# Altium PCB AnalogProject.PcbDoc
Units mil, origin at the board's own origin, x right, y up, seen from the top; angles counter-clockwise.
Board outline 3937.01 x 3937.01 mil, 2 copper layers (Top Layer, Bottom Layer); 74 components, 43 nets, 212 pads, 24 vias.
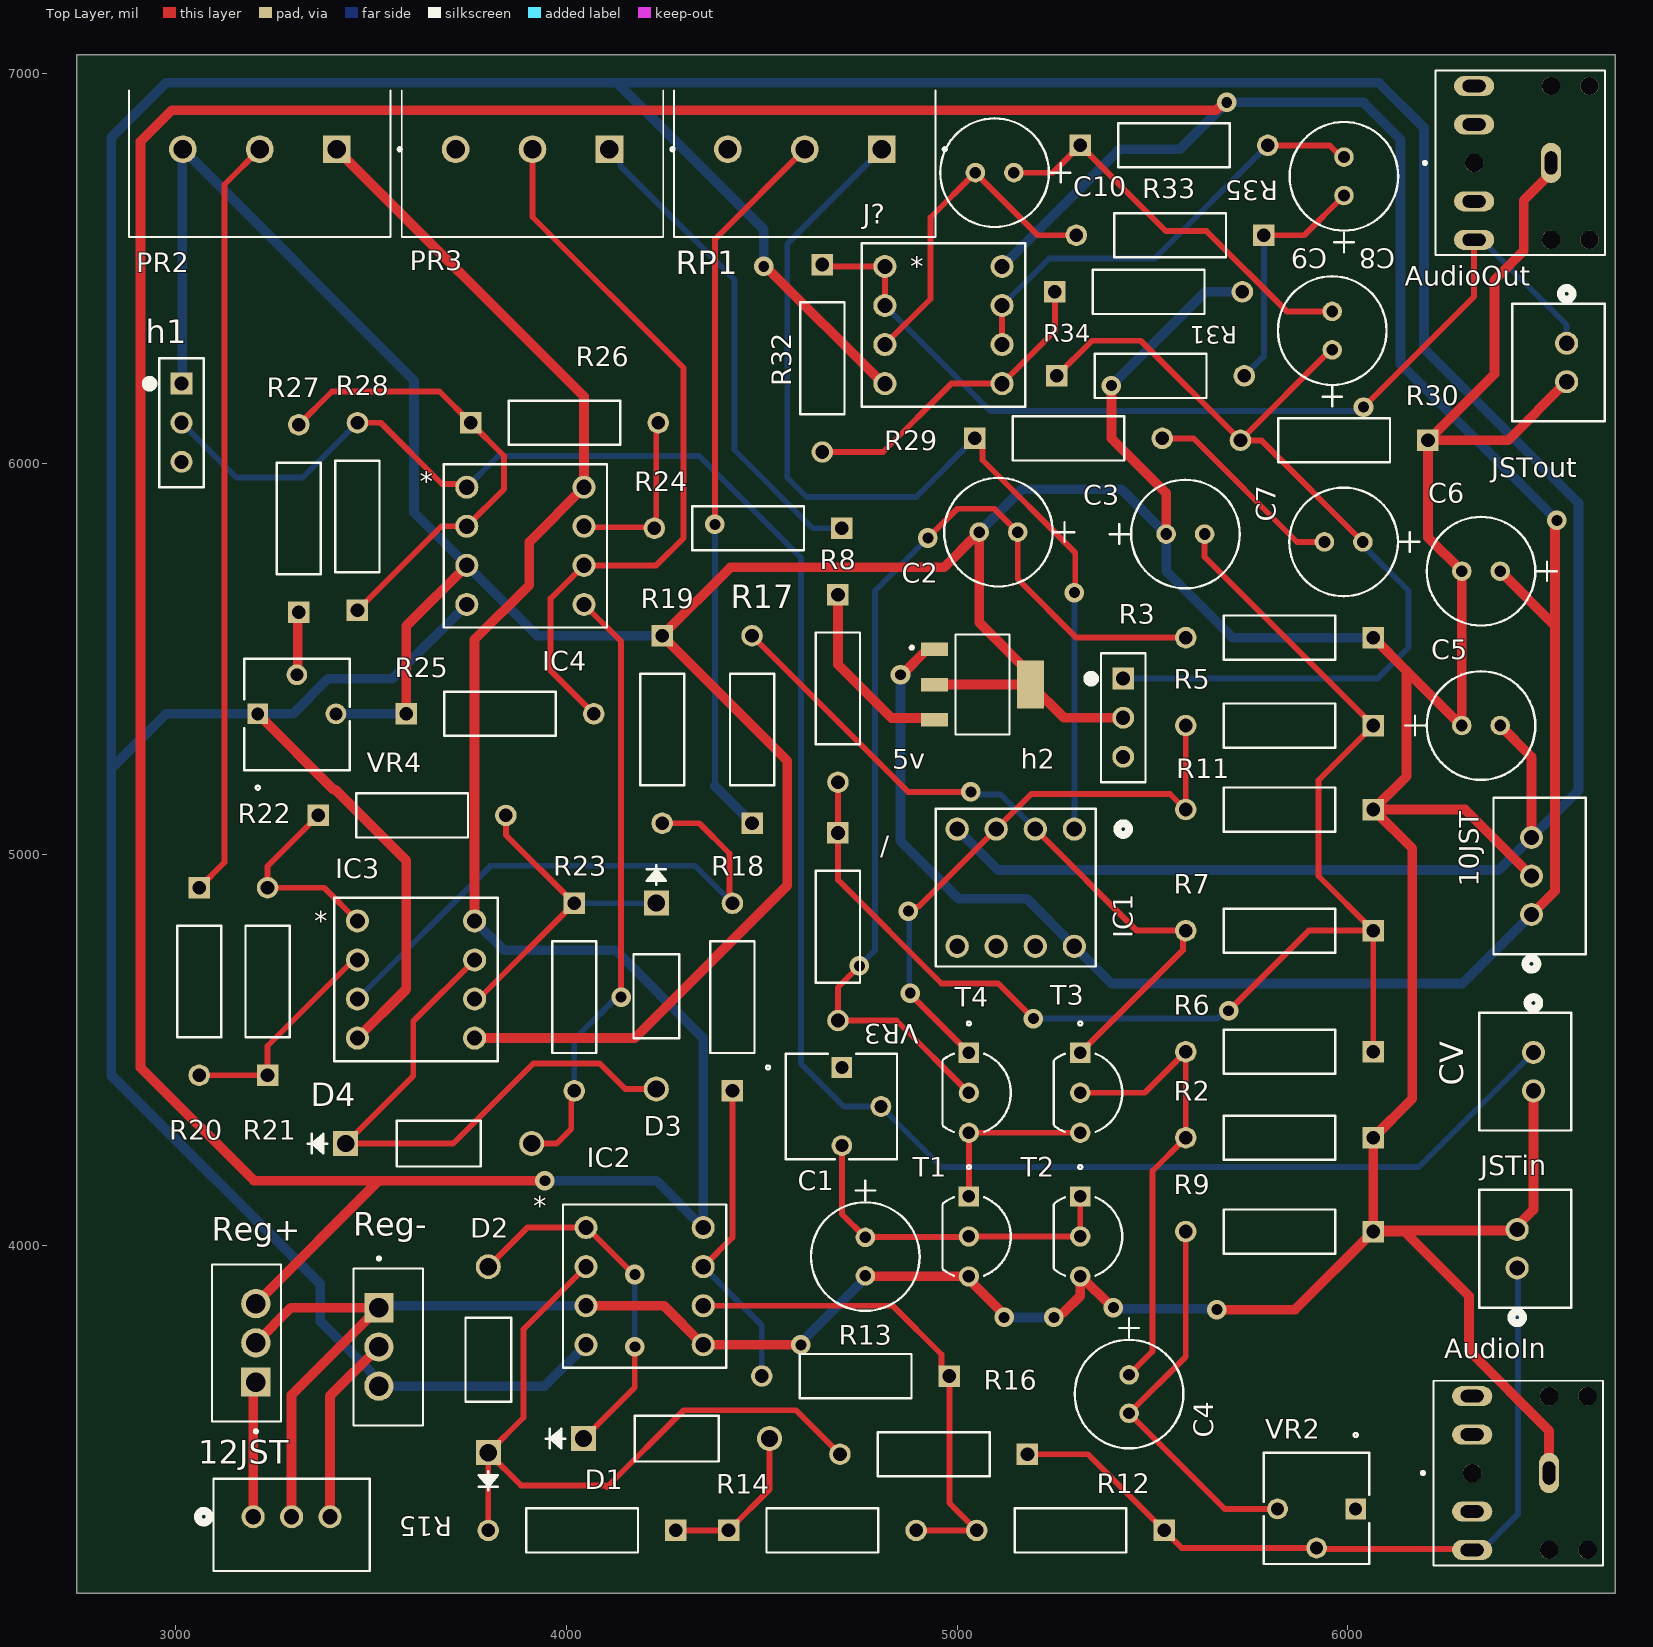
[diagram p0: Top Layer view]
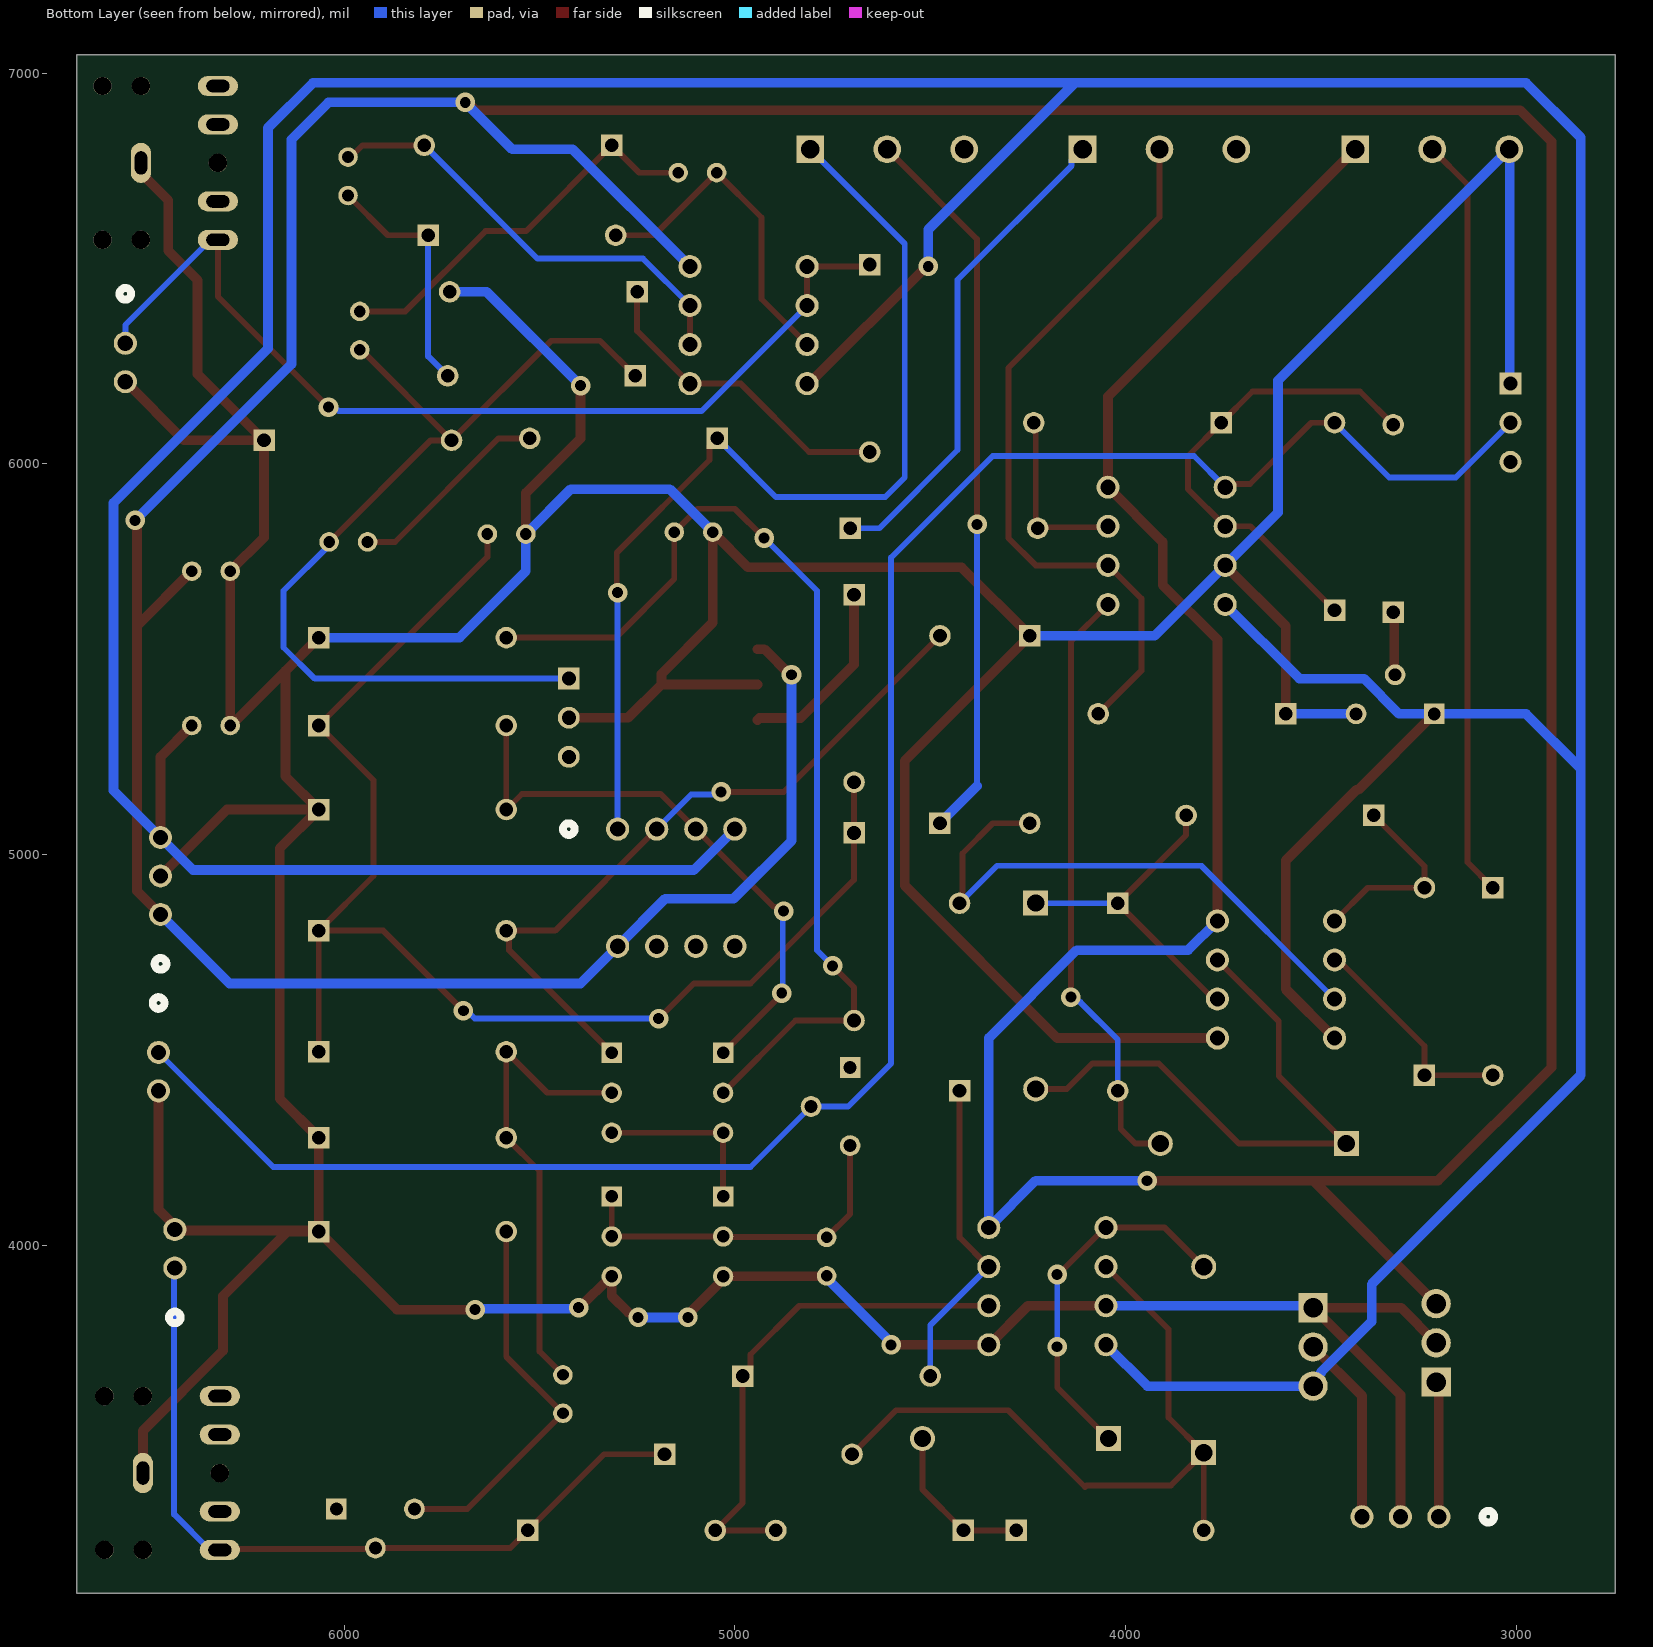
[diagram p1: Bottom Layer view, seen from below]
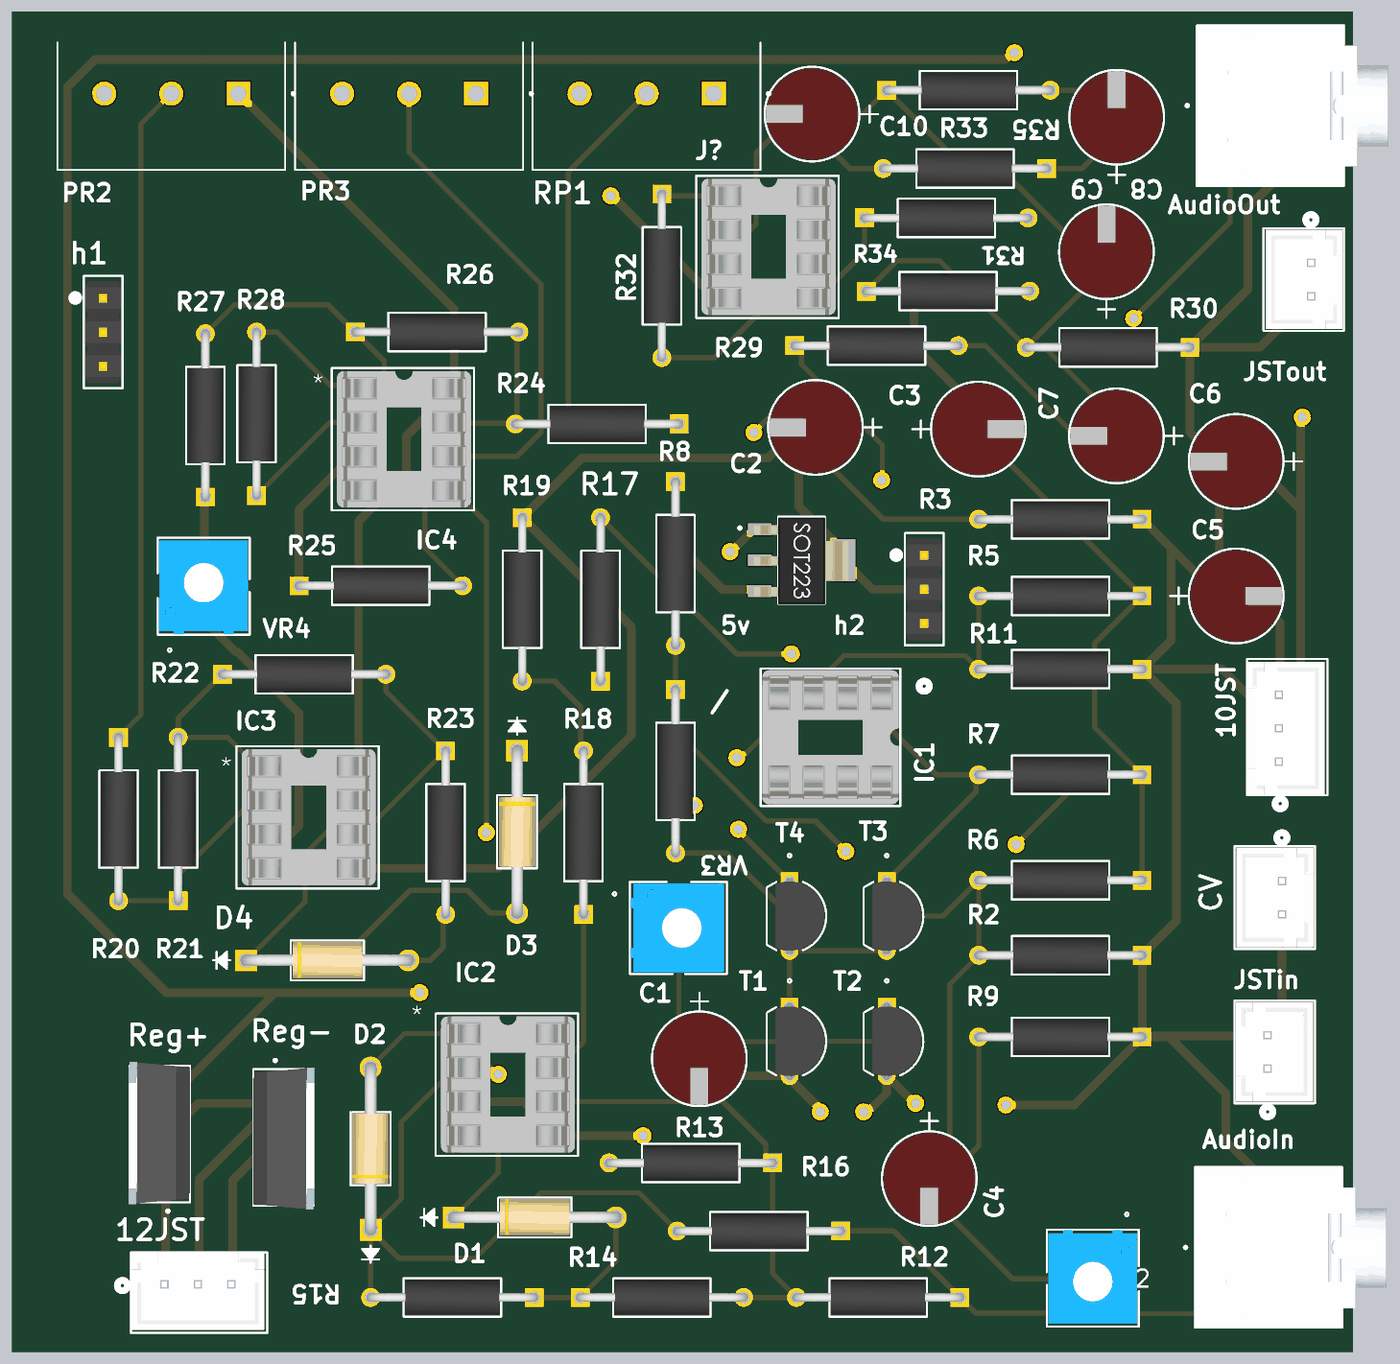
[diagram p2: 3D render of the assembled board from above, using the file's embedded part models]

## Layer stack, top to bottom
Top Solder: solder mask 0.4, Solder Resist, Dk 3.5
Top Layer: signal copper 1.4
Dielectric 1: dielectric 12.6, FR-4, Dk 4.8
Bottom Layer: signal copper 1.4
Bottom Solder: solder mask 0.4, Solder Resist, Dk 3.5

## Board outline
2747.01,3109.51 2747.01,7046.52 6684.02,7046.52 6684.02,3109.51

## Design rules (kind name [scope] priority, off if disabled: settings)
Clearance [All] p1: gap=10 ignorepadtopadclearanceinfootprint=FALSE ismatrix=TRUE
PolygonConnect [All] p1: connectstyle=Relief reliefconductorwidth=10 reliefentries=4 polygonreliefangle="90 Angle" airgapwidth=10
RoutingVias [All] p1: holewidth=28 width=50 viastyle="Through Hole" minholewidth=28 minwidth=50 maxholewidth=28 maxwidth=50
SolderMaskExpansion [All] p1: expansion=4 istentingtop=FALSE
Width MaxMinWidth_1 [All] p1: maxlimit=25 minlimit=10 preferedwidth=10 minimp=50.000000 maximp=50.000000 favimp=50.000000
Width [All] p2: maxlimit=10 minlimit=10 preferedwidth=10
30 further rules are at their usual default settings.

## Components (designator, comment, footprint, x,y, rotation, side; value= is the part's Value field where it differs from the comment)
5v "amsRegulator" SOT230P700X180-4N 5065,5435 r0 top (schematic designator U?)
10JST "3pinJST" CONN_B3B-XH-A_JST 6470,4846.57 r270 top
12JST "3pinJST" CONN_B3B-XH-A_JST 3198.15,3305 r180 top
/ "1/4W_Resistor" STA_RNF14_STP 4695,5055 r270 top (schematic designator R4)
AudioIn "Audioport" CUI_SJ1-3525N 6515,3416.85 r90 top
AudioOut "Audioport" CUI_SJ1-3525N 6520,6770 r90 top
C1 "capacitor" CAP_YX_6P3X11_RUB 4765,4020 r270 top
C2 "capacitor" CAP_YX_6P3X11_RUB 5155,5825 r180 top
C3 "capacitor" CAP_YX_6P3X11_RUB 5535,5820 r0 top
C4 "capacitor" CAP_YX_6P3X11_RUB 5440,3668.21 r270 top
C5 "capacitor" CAP_YX_6P3X11_RUB 6291.57,5330 r0 top
C6 "capacitor" CAP_YX_6P3X11_RUB 6390,5725 r180 top
C7 "capacitor" CAP_YX_6P3X11_RUB 6038.43,5800 r180 top
C8 "capacitor" CAP_YX_6P3X11_RUB 5990,6686.57 r90 top
C9 "capacitor" CAP_YX_6P3X11_RUB 5960,6291.57 r90 top
C10 "capacitor" CAP_YX_6P3X11_RUB 5145,6745 r180 top
CV "2pinJST" CONN_B2B-XH-A_JST 6475,4493.43 r90 top
D1 "UF4007" DO-41_FAS 4044,3505 r0 top
D2 "UF4007" DO-41_FAS 3800,3469 r90 top
D3 "UF4007" DO-41_FAS 4230,4875.5 r270 top
D4 "UF4007" DO-41_FAS 3435,4260 r0 top
h1 "3pinHeaders" CONN_M20-99903XX_HRW 3015,6205 r270 top
h2 "3pinHeaders" CONN_M20-99903XX_HRW 5425,5450 r270 top (schematic designator header2)
IC1 "4_PinSocket" CONN8_1-2199298-2_TEC 5300,5065 r180 top
IC2 "8pinBase" "CONN_A 08-LC-TT_ASM" 4050,4045 r0 top
IC3 "8pinBase" "CONN_A 08-LC-TT_ASM" 3465,4830 r0 top
IC4 "8pinBase" "CONN_A 08-LC-TT_ASM" 3745,5940 r0 top
J? "8pinBase" "CONN_A 08-LC-TT_ASM" 4815,6505 r0 top
JSTin "2pinJST" CONN_B2B-XH-A_JST 6433.28,3941.57 r270 top
JSTout "2pinJST" CONN_B2B-XH-A_JST 6560,6308.43 r90 top
PR2 "roraryPotentiometer" POT_PTN16-A01115K1A1 3411.85,6805 r180 top
PR3 "roraryPotentiometer" POT_PTN16-A01115K1A1 4110,6805 r180 top
R2 "1/4W_Resistor" STA_RNF14_STP 6065,4275 r180 top
R3 "1/4W_Resistor" STA_RNF14_STP 6065,5555 r180 top
R5 "1/4W_Resistor" STA_RNF14_STP 6065,5330 r180 top
R6 "1/4W_Resistor" STA_RNF14_STP 6065,4495 r180 top
R7 "1/4W_Resistor" STA_RNF14_STP 6065,4805 r180 top
R8 "1/4W_Resistor" STA_RNF14_STP 4695,5665 r270 top
R9 "1/4W_Resistor" STA_RNF14_STP 6065,4035 r180 top
R11 "1/4W_Resistor" STA_RNF14_STP 6065,5115 r180 top
R12 "1/4W_Resistor" STA_RNF14_STP 5530,3270 r180 top
R13 "1/4W_Resistor" STA_RNF14_STP 5180,3465 r180 top
R14 "1/4W_Resistor" STA_RNF14_STP 4415,3270 r0 top
R15 "1/4W_Resistor" STA_RNF14_STP 4280,3270 r180 top
R16 "1/4W_Resistor" STA_RNF14_STP 4980,3665 r180 top
R17 "1/4W_Resistor" STA_RNF14_STP 4475,5080 r90 top
R18 "1/4W_Resistor" STA_RNF14_STP 4425,4395 r90 top
R19 "1/4W_Resistor" STA_RNF14_STP 4245,5560 r270 top
R20 "1/4W_Resistor" STA_RNF14_STP 3060,4915 r270 top
R21 "1/4W_Resistor" STA_RNF14_STP 3235,4435 r90 top
R22 "1/4W_Resistor" STA_RNF14_STP 3365,5100 r0 top
R23 "1/4W_Resistor" STA_RNF14_STP 4020,4875 r270 top
R24 "1/4W_Resistor" STA_RNF14_STP 4705,5835 r180 top
R25 "1/4W_Resistor" STA_RNF14_STP 3590,5360 r0 top
R26 "1/4W_Resistor" STA_RNF14_STP 3755,6105 r0 top
R27 "1/4W_Resistor" STA_RNF14_STP 3315,5620 r90 top
R28 "1/4W_Resistor" STA_RNF14_STP 3465,5625 r90 top
R29 "1/4W_Resistor" STA_RNF14_STP 5045,6065 r0 top
R30 "1/4W_Resistor" STA_RNF14_STP 6205,6060 r180 top
R31 "1/4W_Resistor" STA_RNF14_STP 5250,6440 r0 top
R32 "1/4W_Resistor" STA_RNF14_STP 4655,6510 r270 top
R33 "1/4W_Resistor" STA_RNF14_STP 5785,6585 r180 top
R34 "1/4W_Resistor" STA_RNF14_STP 5255,6225 r0 top
R35 "1/4W_Resistor" STA_RNF14_STP 5315,6815 r0 top
Reg+ "+10vregulator" TO255P1020X450X1968-3B 3205,3750 r90 top
Reg- "+10vregulator" TO255P1020X450X1968-3B 3520,3739.61 r270 top
RP1 "roraryPotentiometer" POT_PTN16-A01115K1A1 4806.85,6805 r180 top
T1 "BC550" TO-92-3L_5P33X5P2_ONS 5030,4124.72 r270 top
T2 "BC550" TO-92-3L_5P33X5P2_ONS 5315,4124.72 r270 top
T3 "BC550" TO-92-3L_5P33X5P2_ONS 5315,4492.36 r270 top
T4 "BC550" TO-92-3L_5P33X5P2_ONS 5030,4492.36 r270 top
VR2 "Trimmer" POT_3362P 6020,3325 r180 top
VR3 "Trimmer" POT_3362P 4705,4455 r270 top
VR4 "Trimmer" POT_3362P 3210,5360 r0 top

## Footprints (in the part's own frame and the unit in brackets; to place one, negate y for a bottom-side part, rotate by r counter-clockwise, add the part's x,y. Pads: shape width x height; smd on the part's side, far side on the other; paste and mask are expansions set on the pad)
CAP_YX_6P3X11_RUB [mil]
  round 50 / inner round 60 / far side round 50 hole 30 paste-99999 mask+0: 1(0,0) 2(98.43,0)
  silkscreen extent -145,-139 188,139, body extent -85,-134 184,134, height 493
CONN8_1-2199298-2_TEC [mil]
  round 59.37 / inner round 60 / far side round 59.37 hole 39 paste-99999 mask+0: 1(0,0) 2(100,0) 3(200,0) 4(300,0) 5(0,300) 6(100,300) 7(200,300) 8(300,300)
  silkscreen extent -140,-52 355,352, body extent -50,-47 350,347, height 200
"CONN_A 08-LC-TT_ASM" [mil]
  round 59 / inner round 60 / far side round 59 hole 39 paste-99999 mask+0: 1(0,0) 2(0,-100) 3(0,-200) 4(0,-300) 5(300,-300) 6(300,-200) 7(300,-100) 8(300,0)
  silkscreen extent -59,-359 359,59, body extent -44,-350 350,50, height 200
CONN_B2B-XH-A_JST [mil]
  round 59 / inner round 60 / far side round 59 hole 39 paste-99999 mask+0: 1(0,0) 2(-98.43,0)
  silkscreen extent -200,-97 141,139, body extent -195,-93 96,133, height 276
CONN_B3B-XH-A_JST [mil]
  round 59 / inner round 60 / far side round 59 hole 39 paste-99999 mask+0: 1(0,0) 2(-98.43,0) 3(-196.85,0)
  silkscreen extent -298,-97 142,139, body extent -290,-96 100,130, height 276
CONN_M20-99903XX_HRW [mil]
  rect 56x56 / inner round 60 / far side rect 56x56 hole 36 paste-99999 mask+0: 1(0,0)
  round 56 / inner round 60 / far side round 56 hole 36 paste-99999 mask+0: 2(100,0) 3(200,0)
  silkscreen extent -65,-92 265,57, body extent -50,-52 250,52, height 344
CUI_SJ1-3525N [mm]
  oval 2.616x1.308 hole 0.8 slot 1.5 at 0 deg: 1(0,0)
  oval 1.308x2.616 hole 0.8 slot 1.5 at 90 deg: 2(5,5) 3(-5,5) 10(2.5,5) 11(-2.5,5)
  round 1.2 hole 1.2 unplated: ""(-5,-2.5) ""(-5,0) ""(0,5) ""(5,-2.5) ""(5,0)
  silkscreen extent -6,-3.5 6,8.3, body extent -6.03,-6.77 5.97,7.53, height 5.55
DO-41_FAS [mil]
  rect 64x64 / inner round 60 / far side rect 64x64 hole 44 paste-99999 mask+0: 1(0,0)
  round 64 / inner round 60 / far side round 64 hole 44 paste-99999 mask+0: 2(476,0)
  silkscreen extent -97,-58 346,58, body extent -17,-53 493,53, height 107
POT_3362P [mil]
  rect 53x53 / inner round 60 / far side rect 53x53 hole 33 paste-99999 mask+0: 1(0,0)
  round 53 / inner round 60 / far side round 53 hole 33 paste-99999 mask+0: 2(100,100) 3(200,0)
  silkscreen extent -35,-194 235,141, body extent -30,-143 230,133, height 192
POT_PTN16-A01115K1A1 [mm]
  rect 1.8x1.8 / inner round 1.8 / far side rect 1.8x1.8 hole 1.2: 1(0,0)
  round 1.8 hole 1.2: 2(5,0) 3(10,0)
  silkscreen extent -4.2,-3.81 13.5,5.69, body extent -3.42,-18.08 13.58,5.63, height 21.2
SOT230P700X180-4N [mm]
  rect 1.76x0.88 smd: 1(-3.125,2.3) 2(-3.125,0) 3(-3.125,-2.3)
  rect 1.76x3.14 smd: 4(3.125,0)
  silkscreen extent -4.7,-3.25 1.75,3.25, body extent -3.51,-3.3 3.51,3.2, height 1.6
STA_RNF14_STP [mil]
  rect 55x55 / inner round 60 / far side rect 55x55 hole 35 paste-99999 mask+0: 1(0,0)
  round 55 / inner round 60 / far side round 55 hole 35 paste-99999 mask+0: 2(480,0)
  silkscreen extent 97,-56 383,57, body extent -12,-51 493,51, height 103
TO255P1020X450X1968-3B [mm]
  rect 1.905x1.905 / inner round 1.905 / far side rect 1.905x1.905 hole 1.27: 1(-2.55,0)
  round 1.905 hole 1.27: 2(0,0) 3(2.55,0)
  silkscreen extent -5.85,-1.65 5.1,2.86, body extent -5.23,-1.65 5.37,2.92, height 24.76
TO-92-3L_5P33X5P2_ONS [mil]
  rect 52x52 / inner round 60 / far side rect 52x52 hole 32 paste-99999 mask+0: 1(0,0)
  round 52 / inner round 60 / far side round 52 hole 32 paste-99999 mask+0: 2(102.36,0) 3(204.72,0)
  silkscreen extent -80,-68 203,107, body extent -11,-43 216,102, height 210

## Part data
5v: "Temperature sensor [Smartec] SMT172-SOT-223 Temperature sensor", Package="SOT-223-3 Smartec", Availability="Not in stock", Check_prices=https://www.snapeda.com/parts/SMT172-SOT223/Smartec/view-part/?ref=eda, MF=Smartec, MP=SMT172-SOT223, Price=None, SnapEDA_Link=https://www.snapeda.com/parts/SMT172-SOT223/Smartec/view-part/?ref=snap
10JST 12JST CV JSTin JSTout: "No Description Available", Mfr_Name=JST, RefDes=RefDes, TYPE=Type
/ R2 R3 R6 R30: "100kohm", Mfr_Name="Stackpole International"
AudioIn AudioOut: "3.5 mm, Stereo, Right Angle, Through Hole, 3 Conductors, 2 Internal Switches, Audio Jack Connector", Package=None, Check_prices=https://www.snapeda.com/parts/SJ1-3525N/CUI+Devices/view-part/?ref=eda, CUI_purchase_URL=https://www.cuidevices.com/product/interconnect/connectors/audio-connectors/jacks/sj1-3525n?utm_source=snapeda.com&utm_medium=referral&utm_campaign=snapedaBOM, MF="CUI Devices", MP=SJ1-3525N, SnapEDA_Link=https://www.snapeda.com/parts/SJ1-3525N/CUI+Devices/view-part/?ref=snap
C1 C2 C4 C7: "10u", Mfr_Name=Rubycon
C3: "220u", Mfr_Name=Rubycon
C5 C6: "33u", Mfr_Name=Rubycon
C8 C9 C10: "No Description Available", Mfr_Name=Rubycon
D1 D2 D3 D4: "No Description Available", Mfr_Name="onsemi / Fairchild Semiconductor", RefDes=RefDes, TYPE=Type
h1 h2: "No Description Available", Mfr_Name=Harwin, RefDes=RefDes, TYPE=Type
IC1: "No Description Available", Mfr_Name="TE Connectivity", RefDes=RefDes, TYPE=DIP
IC2 IC3 IC4 J?: "No Description Available", Mfr_Name=Assmann, RefDes=RefDes, TYPE=Type
PR2: "10kohm", Package=None, Availability=Unavailable, MF="{'manufacturer': u'CUI Devices'}", MP=PTN16-A01115K1A1, Price=None
PR3: "20kohm", Package=None, Availability=Unavailable, MF="{'manufacturer': u'CUI Devices'}", MP=PTN16-A01115K1A1, Price=None
R5 R7 R9 R14 R17 R18 R19 R20 R21 R24 R25 R26 R27 R28: "1kohm", Mfr_Name="Stackpole International"
R8: "10ohm", Mfr_Name="Stackpole International"
R11: "10kohm", Mfr_Name="Stackpole International"
R12 R13 R15 R16 R22 R23: "2kohm", Mfr_Name="Stackpole International"
R29: "100ohm", Mfr_Name="Stackpole International"
R31 R32 R33 R34 R35: "No Description Available", Mfr_Name="Stackpole International"
Reg+ Reg-: "Linear Voltage Regulator IC Positive Fixed 1 Output 1.5A TO-220AB", Package="TO-220-3 STMicroelectronics", Check_prices=https://www.snapeda.com/parts/L7810CV/STMicroelectronics/view-part/?ref=eda, MF=STMicroelectronics, MP=L7810CV, SnapEDA_Link=https://www.snapeda.com/parts/L7810CV/STMicroelectronics/view-part/?ref=snap
RP1: "20Kohm", Package=None, Availability=Unavailable, MF="{'manufacturer': u'CUI Devices'}", MP=PTN16-A01115K1A1, Price=None
T1 T2 T3 T4: "No Description Available", Mfr_Name=onsemi, RefDes=RefDes, TYPE=Type
VR2: "100kohm", Mfr_Name="Bourns Electronics"
VR3: "10kohm", Mfr_Name="Bourns Electronics"
VR4: "1kohm", Mfr_Name="Bourns Electronics"

## Via types
v1: diameter 50, hole 28, Top Layer to Bottom Layer, 24 vias

## Nets (pads, with @x,y where several pads share a name; then routed paths per layer and width w, separated by ;. In a path a pad name is that pad's centre, name@x,y a point inside that pad or via, vN(x,y) a via of type N, cw(c..) or ccw(c..) an arc to the next point about the centre after c; other vN are vias at no path point)
5Vpower: /.1 C3.2 R5.1 R6.1 R7.1 R8.2 | length 3480
  Top Layer w15: R8.2 /.1 4695,4935 4960,4670 5105,4670 v1(5195,4580) ; C3.2 5633.43,5761.57 R5.1 5925,5190 5925,4945 R7.1 ; v1(5695,4600) 5900,4805 R7.1 ; R6.1 R7.1
  Bottom Layer w15: v1(5195,4580) 5665.53,4580 5685.53,4600 v1(5695,4600)
+10: 5v.1 10JST.1 C6.1 IC1.5 IC2.8 IC3.8 IC4.8 J?.8 PR2.1 Reg+.3 | length 16754.7
  Top Layer w25: Reg+.3 3519.61,4165 ; PR2.1 4045,6171.85 IC4.8 3905,5800 3905,5690 3765,5550 IC3.8 ; v1(3945,4165) 3519.61,4165 ; v1(4855,5460) 4859.09,5460 4924.65,5525.55 5v.1 ; v1(5690,6925) 5683.24,6925 5663.24,6905 2990,6905 2910,6825 2910,4455 3200,4165 3519.61,4165 ; C6.1 6530,5585 ; 10JST.1 6530,4906.57 6530,5585 ; v1@6530,5832.32 6530,5585
  Bottom Layer w25: IC3.8 3840,4755 4125,4755 4350,4530 IC2.8 4230,4165 v1(3945,4165) ; v1(4855,5460) 4855,5035 5003.26,4886.74 5178.26,4886.74 IC1.5 5395,4670 6293.43,4670 10JST.1 ; J?.8 5415,6805 5570,6805 v1(5690,6925) 6040,6925 6135,6830 6135,6255 v1(6535,5855)
+12: 12JST.1 Reg+.1 | length 347.4
  Top Layer w25: 12JST.1 3198.15,3642.76 Reg+.1
-10: 10JST.3 C5.2 IC1.4 IC2.4 IC3.4 IC4.4 J?.4 Reg-.3 VR4.1 | length 14602.3
  Top Layer w25: VR4.1 3404.5,5165.5 3409.5,5165.5 3590,4985 3590,4655 IC3.4 ; v1(4505,6505) 4510,6505 4810,6205 J?.4 ; C5.2 6470,5250 10JST.3
  Bottom Layer w25: IC4.4 3555,5450 3390,5450 3300,5360 VR4.1 2975,5360 2835,5220 ; IC2.4 3944.21,3639.21 Reg-.3 3520,3652.74 3499.74,3673.01 3499.74,3675.02 3370,3804.75 3370,3900 2835,4435 2835,5220 ; v1(4505,6505) 4505,6600 4130,6975 ; IC1.4 5105,4960 6386.57,4960 10JST.3 6590,5163.43 6590,5900 6195,6295 6195,6860 6080,6975 4130,6975 ; 2835,5220 2835,6835 2975,6975 4130,6975
-12: 12JST.3 Reg-.2 | length 486.4
  Top Layer w25: 12JST.3 3395,3614.61 Reg-.2
Audio: AudioIn.3 JSTin.1 R12.1 R13.1 VR2.2 | length 2024.7
  Top Layer w15: R13.1 5335,3465 R12.1 5575,3225 VR2.2 5922.5,3222.5 6315.65,3222.5 AudioIn.3
  Bottom Layer w15: AudioIn.3 6343.9,3220 6435,3311.1 JSTin.1@6435,3941.57
controlVoltage: CV.1 h1.2 IC4.1 R28.2 VR3.2 | length 5311.5
  Top Layer w15: R28.2 3525,6105 3681.58,5948.42 3736.58,5948.42 IC4.1
  Bottom Layer w15: h1.2 3155,5965 3325,5965 R28.2 ; IC4.1 3825,6020 4340,6020 4600,5760 4600,4465 4710,4355 VR3.2 4960,4200 6181.57,4200 CV.1
down: IC3.1 R21.2 R22.1 | length 504.1
  Top Layer w15: R22.1 3235,4970 R21.2 3380,4915 IC3.1
ExpanderOut: AudioOut.3 J?.1 J?.2 JSTout.1 R32.1 | length 2531.7
  Top Layer w15: R32.1 4660,6505 J?.1 J?.2 ; v1@6040,6154.45 v1(6040,6145) 6323.15,6428.15 AudioOut.3
  Bottom Layer w15: J?.2 5085,6135 6013.71,6135 6017.02,6138.3 6033.3,6138.3 v1(6040,6145) ; AudioOut.3 6341.85,6573.15 6560,6355 JSTout.1
GND: 5v.2 5v.4 10JST.2 12JST.2 AudioIn.1 AudioOut.1 C1.2 C2.2 C3.1 C5.1 C6.2 CV.2 h1.1 h2.2 IC2.3 IC2.5 IC3.5 IC4.3 JSTin.2 JSTout.2 PR2.3 R2.1 R3.1 R9.1 R11.1 R19.1 R25.1 R30.1 R31.2 Reg+.2 Reg-.1 T1.3 T2.3 VR4.3 | length 18779.6
  Top Layer w15: C1.2 C1.2@4765.79,3920.79 ; T1.3@5029.21,3920.79 T1.3 T1.3@5030,3912.5 ; v1(5120,3815) v1@5120,3822.5 ; v1(5247.5,3815) 5256.97,3815 5269.31,3827.34 5272.34,3827.34 ; T2.3 T2.3@5317.5,3920 ; v1@5397.5,3840 v1(5400,3840)
  Top Layer w25: Reg+.2 3295,3840 Reg-.1 3296.57,3616.57 12JST.2 ; R25.1 3590,5585 IC4.3 ; IC3.5 4175,4530 4565,4920 4565,5240 R19.1 4420,5735 4966.57,5735 C2.2 5056.57,5593.62 5188.03,5462.17 5v.4 ; IC2.3 4250,3845 IC2.5 v1(4600,3745) ; C1.2@4765.79,3920.79 T1.3@5029.21,3920.79 ; 5v.2 5v.4 ; T1.3@5030,3912.5 v1@5120,3822.5 ; 5272.34,3827.34 5315,3870 T2.3 ; T2.3@5317.5,3920 v1@5397.5,3840 ; v1(5395,6200) 5395,6065 5535,5925 C3.1 ; h2.2 5273.03,5350 5v.4 ; v1(5665,3835) 5865,3835 R9.1 ; R3.1 6150,5470 ; JSTin.2@6432.5,4037.5 6067.5,4037.5 R9.1 ; JSTin.2 6433.28,4049.2 6475,4090.92 CV.2 ; 10JST.2 6300,5115 R11.1 ; AudioIn.1 6515,3525 6310,3730 6310,3870 6145,4035 R9.1 ; AudioOut.1 6520,6744.25 6450,6674.25 6450,6545 6375,6470 6375,6230 R30.1 ; JSTout.2 6410,6060 R30.1 ; R9.1 R2.1 6165,4375 6165,5015 R11.1 ; R11.1 6150,5200 6150,5470 ; 6150,5470 6290,5330 C5.1 C6.2 6205,5811.57 R30.1
  Bottom Layer w15: v1(5400,3840) v1@5402.5,3837.5 ; v1@5662.5,3837.5 v1(5665,3835)
  Bottom Layer w25: h1.1 3016.57,6206.57 3016.57,6803.43 PR2.3 3610,6213.15 3610,5875 IC4.3 3925,5560 R19.1 ; VR4.3 R25.1 ; Reg-.1 3525,3845 IC2.3 ; v1(4600,3745) 4600,3750.79 4765,3915.79 C1.2 ; C2.2 5166.57,5935 5420,5935 C3.1 5535,5725 5705,5555 R3.1 ; v1(5120,3815) v1(5247.5,3815) ; v1(5395,6200) 5635,6440 R31.2 ; v1@5402.5,3837.5 v1@5662.5,3837.5
Net5v_3: 5v.3 R8.1 | length 484.3
  Top Layer w25: R8.1 4695,5486.5 4832.23,5349.27 4937.15,5349.27 5v.3
NetC1_1: C1.1 T1.2 T2.1 T2.2 VR3.3 | length 913.2
  Top Layer w15: VR3.3 4705,4080 C1.1 4766.18,4021.18 5028.82,4021.18 T1.2 T2.2 T2.1
NetC2_1: /.2 C2.1 R3.2 T4.2 | length 2639.9
  Top Layer w15: v1(4750,4715) 4695,4660 /.2 4845,4575 T4.2 ; v1(4925,5810) 5000,5885 5095,5885 C2.1 5155,5705 5305,5555 R3.2
  Bottom Layer w15: v1(4750,4715) 4790,4755 4790,5675 v1(4925,5810)
NetC4_1: C4.1 R2.2 R6.2 T3.2 | length 1200.3
  Top Layer w15: T3.2 5480,4390 R6.2 R2.2 5500,4190 5500,3728.21 C4.1
NetC4_2: C4.2 R9.2 VR2.3 | length 1006.7
  Top Layer w15: R9.2 5585,3714.79 C4.2 5684.79,3325 VR2.3
NetC7_2: C7.2 R29.2 | length 524.8
  Top Layer w15: R29.2 5605,6065 5870,5800 C7.2
NetC8_1: C8.1 R33.1 R34.2 | length 627.8
  Top Layer w15: R33.1 5888.43,6585 C8.1
  Bottom Layer w15: R34.2 5785,6275 R33.1
NetC9_2: C9.2 C10.1 R35.1 | length 1020
  Top Layer w15: C10.1 5245,6745 R35.1 5534.15,6595.85 5637.79,6595.85 5843.64,6390 C9.2
NetC10_2: C10.2 J?.3 R33.2 | length 860.6
  Top Layer w15: J?.3 4931.65,6421.65 4931.65,6630.07 C10.2 5206.57,6585 R33.2
NetD1_1: D1.1 D2.2 IC2.1 | length 940.4
  Top Layer w15: D2.2 3900,4045 IC2.1 ; D1.1 4175,3636 v1(4175,3740) ; IC2.1@4052.5,4045 v1@4172.5,3925
  Top Layer w25: IC2.1 IC2.1@4052.5,4045 ; v1@4172.5,3925 v1(4175,3925)
  Bottom Layer w15: v1(4175,3740) v1(4175,3925)
NetD1_2: D1.2 R14.1 R15.1 | length 413.5
  Top Layer w15: R15.1 R14.1 4520,3375 D1.2
NetD2_1: D2.1 IC2.2 R13.2 R15.2 | length 1842.8
  Top Layer w15: R15.2 D2.1 ; IC2.2 3890,3785 3890,3559 D2.1 ; R13.2 4587.57,3577.43 4300,3577.43 4103.79,3381.21 4100,3385 3884,3385 D2.1
NetIC1_1: IC1.1 R29.1 RP1.1 | length 2610.5
  Top Layer w15: R29.1 5065,6045 5065,6009.74 5302.24,5772.5 5302.24,5672.24 v1(5300,5670)
  Bottom Layer w15: RP1.1 4565,6563.15 4565,5965 4615,5915 4895,5915 R29.1 ; IC1.1 v1(5300,5670)
NetIC2_6: IC2.6 R12.2 R14.2 R16.1 | length 1304.1
  Top Layer w15: IC2.6 4835,3845 4960,3720 4960,3685 R16.1 4980,3340 R12.2 R14.2
NetIC3_2: IC3.2 R20.2 R21.1 | length 571.1
  Top Layer w15: R20.2 R21.1 3235,4510 3455,4730 IC3.2
NetIC3_3: IC3.3 R18.2 R19.2 | length 1477.1
  Top Layer w15: R19.2 4340,5080 4417.35,5002.65 4417.35,4882.65 R18.2
  Bottom Layer w15: IC3.3 3805,4970 3805,4971.21 4328.79,4971.21 R18.2
NetIC4_2: IC4.2 R26.1 R27.2 R28.1 | length 1217
  Top Layer w15: R27.2 3400,6185 3675,6185 R26.1 3840,6020 3840,5935 IC4.2 3680,5840 R28.1
NetIC4_6: IC4.6 PR3.2 R25.2 | length 1900.2
  Top Layer w15: PR3.2 3913.15,6631.85 4300,6245 4300,5810 4230,5740 IC4.6 3960,5655 ; 3959.64,5655 3959.64,5470.36 R25.2
NetIC4_7: IC4.7 R24.2 R26.2 | length 456.2
  Top Layer w15: IC4.7@4047.5,5837.5 R24.2@4222.5,5837.5 ; R24.2 4230,5840 4230,6100 R26.2
  Top Layer w25: IC4.7 IC4.7@4047.5,5837.5 ; R24.2@4222.5,5837.5 R24.2
NetJ?_5: J?.5 R31.1 R32.2 | length 823.4
  Top Layer w15: R32.2 4810,6030 4985,6205 J?.5 5250,6340 R31.1
NetPR2_2: PR2.2 R20.1 | length 1961.3
  Top Layer w15: R20.1 3125,4980 3125,6715 PR2.2
  Bottom Layer w25: R20.1@3055,4920 R20.1
NetPR3_1: PR3.1 R24.1 | length 1260.4
  Bottom Layer w15: PR3.1 4137.93,6777.07 4137.93,6763.06 4430,6470.99 4430,6035 4630,5835 R24.1
NetR17_1: R17.1 RP1.2 | length 1859.6
  Top Layer w15: v1(4380,5845) 4380,6189.9 4380,6575 RP1.2
  Bottom Layer w15: 4380,5175 v1(4380,5845)
  Bottom Layer w25: 4380,5175 R17.1
NetR27_1: R27.1 VR4.2 | length 162.1
  Top Layer w25: VR4.2 3312.5,5462.5 3312.5,5617.5 R27.1
NetT1_1: T1.1 T3.3 T4.3 | length 447.9
  Top Layer w15: T1.1 T4.3 T3.3
notch: C8.2 J?.6 J?.7 R35.2 | length 1157.3
  Top Layer w15: J?.6 J?.7 ; R35.2 5952.82,6815 5982.82,6785 C8.2
  Bottom Layer w15: J?.7 5235,6525 5505,6525 R35.2
out1: D3.1 IC3.6 R22.2 R23.1 | length 864.2
  Top Layer w15: IC3.6 3775,4630 R23.1 3845,5050 R22.2
  Bottom Layer w15: R23.1 4229.5,4875 D3.1
out2: D3.2 D4.1 IC3.7 | length 1513.7
  Top Layer w15: IC3.7 3608.04,4573.04 3608.04,4433.04 D4.1 3710,4260 3915,4465 4085,4465 4150.5,4399.5 D3.2
RectifierOut: IC2.7 R16.2 R18.1 | length 823.2
  Top Layer w15: IC2.7 4425,4020 R18.1
  Bottom Layer w15: IC2.7 4500,3795 R16.2
T3collector: IC1.2 R7.2 R17.2 T3.1 | length 1847.2
  Top Layer w15: R17.2 4875,5160 v1(5035,5160) ; IC1.2 5460,4805 R7.2 5577.64,4797.64 5577.64,4755 T3.1
  Bottom Layer w15: v1(5035,5160) 5041.7,5153.3 5111.7,5153.3 IC1.2
T4collector: IC1.3 R5.2 R11.2 T4.1 | length 1492.7
  Top Layer w15: v1(4875,4855) 4884.47,4855 4895.56,4866.09 4901.09,4866.09 IC1.3 5190,5155 5545,5155 R11.2 R5.2 ; v1(4880,4645) 4880,4642.36 T4.1
  Bottom Layer w15: v1(4875,4855) 4877.5,4852.5 4877.5,4647.5 v1(4880,4645)
ThLevel: D4.2 IC4.5 R23.2 | length 1558.3
  Top Layer w15: D4.2 3975,4260 4012.35,4297.35 4012.35,4387.35 R23.2 ; IC4.5 4140,5545 v1(4140,4635)
  Bottom Layer w15: R23.2 4020,4526.29 4115.77,4622.06 4117.58,4622.06 4130.53,4635 v1(4140,4635)
VCAout: C7.1 C9.1 h2.1 R30.2 R34.1 | length 2446.4
  Top Layer w15: R34.1 5345,6315 5470,6315 R30.2 ; C9.1 5956.57,6291.57 R30.2 ; C7.1 5778.43,6060 R30.2
  Bottom Layer w15: h2.1 6075,5450 6155,5530 6155,5675 6038.43,5791.57 C7.1
pads on no net: AudioIn. AudioIn.2 AudioIn.10 AudioIn.11 AudioOut. AudioOut.2 AudioOut.10 AudioOut.11 h1.3 h2.3 IC1.6 IC1.7 IC1.8 PR3.3 RP1.3 VR2.1 VR3.1

## Text inside footprints (layer, text, board x,y; h text height)
IC2: Top Overlay "*" at 3915,4075 h50; Mechanical 13 "*" at 3993.5,4020 h50
IC3: Top Overlay "*" at 3355,4805 h50; Mechanical 13 "*" at 3408.5,4805 h50
IC4: Top Overlay "*" at 3625,5930 h50; Mechanical 13 "*" at 3688.5,5915 h50
J?: Top Overlay "*" at 4880,6480 h50; Mechanical 13 "*" at 4758.5,6480 h50